# Altium PCB Load_Cell_Amplifier_V2.PcbDoc
Units mil, origin at the board's own origin, x right, y up, seen from the top; angles counter-clockwise.
Board outline 2995 x 1460 mil, 2 copper layers (Top Layer, Bottom Layer); 46 components, 42 nets, 194 pads, 48 vias.
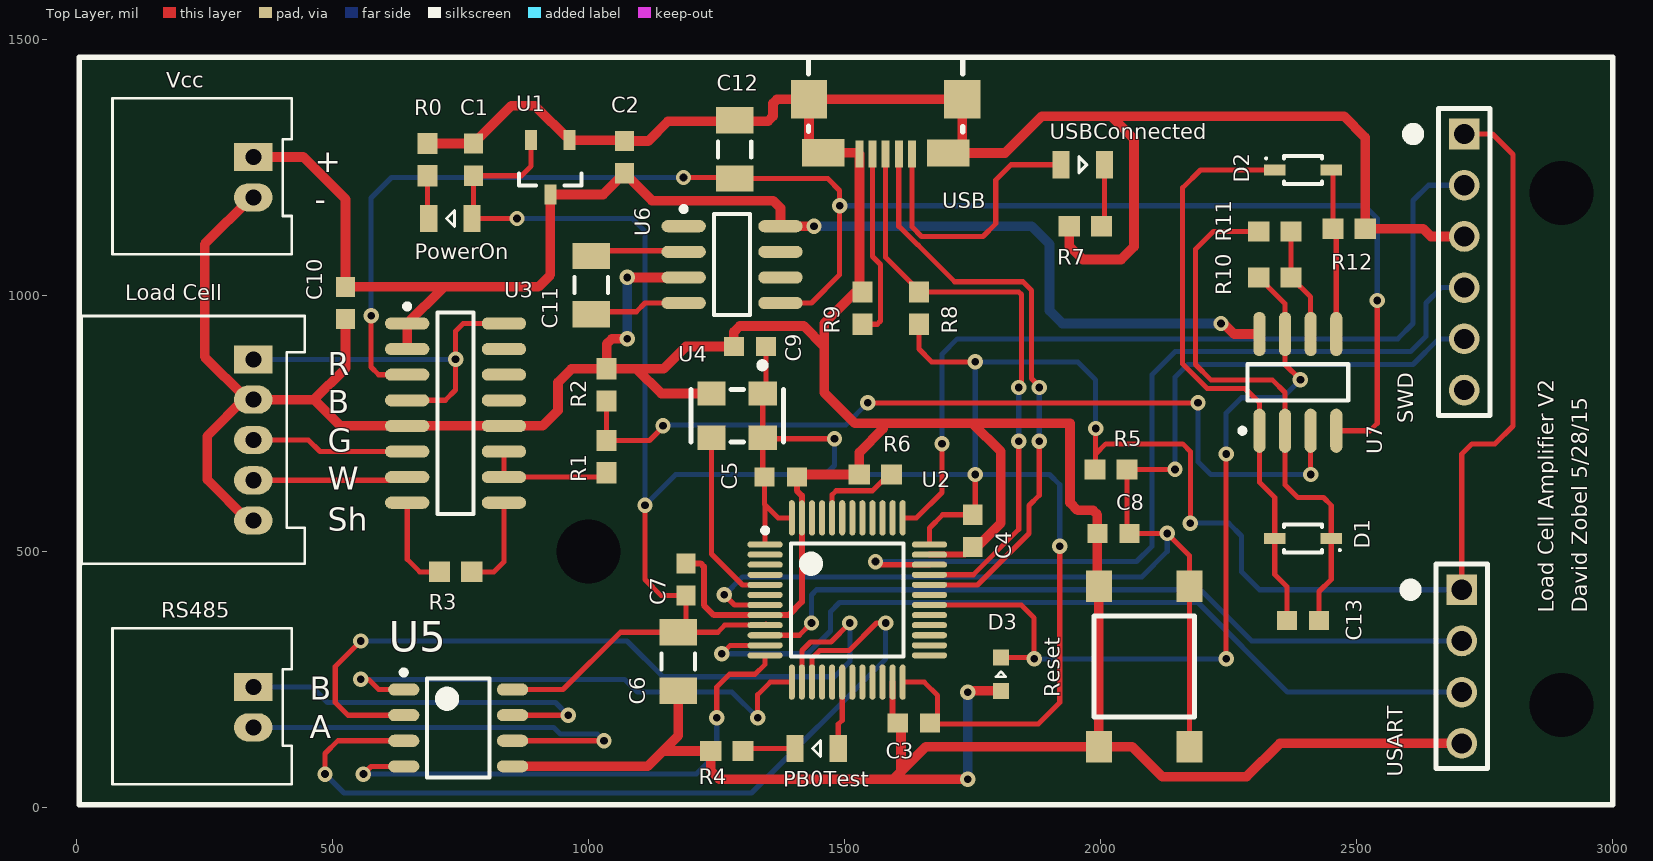
[diagram p0: Top Layer view]
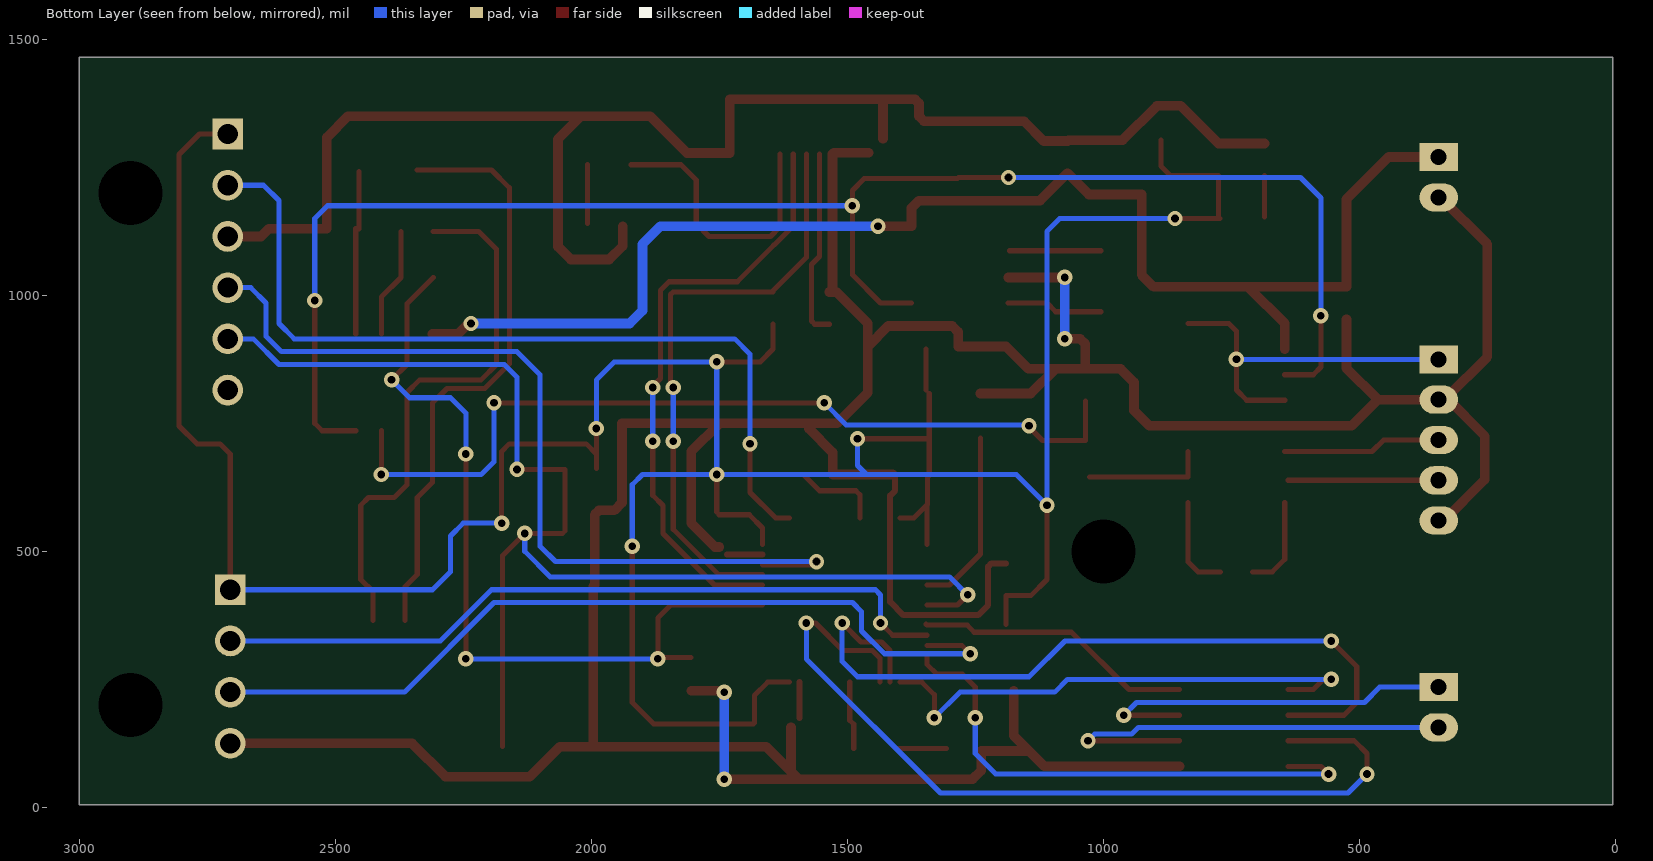
[diagram p1: Bottom Layer view, seen from below]

## Layer stack, top to bottom
Top Layer: signal copper 1.4
Dielectric: dielectric 12.6, FR-4, Dk 4.8
Bottom Layer: signal copper 1.4

## Board outline
5,5 5,1465 3000,1465 3000,5

## Design rules (kind name [scope] priority, off if disabled: settings)
Clearance [All] p1: gap=7
DiffPairsRouting [All] p1: maxlimit=10 minlimit=10 mostfreqgap=10 maxuncoupledlength=500
HoleSize [All] p1: absolutevalues=TRUE maxlimit=150 minlimit=1 maxpercent=80.000 minpercent=20.000
MinimumSolderMaskSliver [All] p1: minsoldermaskwidth=1
PolygonConnect [All] p1: connectstyle=Relief reliefconductorwidth=10 reliefentries=4 polygonreliefangle="90 Angle" airgapwidth=10
RoutingVias [All] p1: holewidth=10 width=20 viastyle="Through Hole" minholewidth=10 minwidth=20 maxholewidth=10 maxwidth=20
SilkToSolderMaskClearance [IsPad] p1: minsilkscreentomaskgap=5 clearancetoexposedcopper=TRUE
SolderMaskExpansion [All] p1: expansion=4
Width [All] p1: maxlimit=20 minlimit=10 preferedwidth=10
24 further rules are at their usual default settings.

## Classes and differential pairs
differential pair USB: +USB_P -USB_N

## Components (designator, comment, footprint, x,y, rotation, side; value= is the part's Value field where it differs from the comment)
C1 "Cap" CAPC0603 775,1265 r90 top
C2 "Cap" CAPC0603 1070,1270 r90 top
C3 "Cap" CAPC0603 1635,165 r180 top
C4 "Cap" CAPC0603 1750,540 r270 top
C5 "Cap" CAPC0603 1375,645 r0 top
C6 "Cap" CAPC1206 1175,285 r90 top
C7 "Cap" CAPC0603 1190,445 r90 top
C8 "Cap" CAPC0603 2025,535 r180 top
C9 "Cap" CAPC0603 1315,900 r180 top
C10 "Cap" CAPC0603 525,985 r90 top
C11 "Cap" CAPC1206 1005,1020 r90 top
C12 "Cap" CAPC1206 1285,1285 r270 top
C13 "Cap" CAPC0603 2395,365 r0 top
D1 "Diode" SOD-323F 2395,525 r180 top
D2 "Diode" SOD-323F 2395,1245 r0 top
D3 "Zener" LED0603 1805,260 r90 top
"Load Cell" "MOLEX-HDR-1x5-SHERLOCK_RA" "MOLEX-HDR-1X5-SHERLOCK- RA" 345,875 r90 top
PB0Test "LED" LED0805 1445,115 r180 top
PowerOn "LED" LED0805 730,1150 r180 top
R0 "Res" RES0603 685,1265 r270 top
R1 "Res" RES0603 1035,685 r90 top
R2 "Res" RES0603 1035,825 r90 top
R3 "Res" RES0603 740,460 r0 top
R4 "Res" RES0603 1270,110 r0 top
R5 "Res" RES0603 2020,660 r0 top
R6 "Res" RES0603 1560,650 r180 top
R7 "Res" RES0603 1970,1135 r0 top
R8 "Res" RES0603 1645,975 r90 top
R9 "Res" RES0603 1535,975 r90 top
R10 "Res" RES0603 2340,1035 r180 top
R11 "Res" RES0603 2340,1125 r0 top
R12 "Res" RES0603 2485,1130 r180 top
Reset "Button" PTS645xxxxSMTR92 2085,275 r90 top
RS485 "2-pin Horz Sherlock" MOLEX-HDR-1X2-SHERLOCK-HORZ 345,235 r90 top
SWD "SWD" SWD_STM32 2710,1315 r0 top
U1 "MCP1703AT" MCP1703AT-xx02EDB 925,1250 r270 top
U2 "STM32F072CB" STM32F072CB 1505,405 r0 top
U3 "INA125" SOIC127P600X175-16N 740,770 r0 top
U4 "636L3C008M" 636L3C 1290,765 r180 top
U5 "SP3485" SP3485 745,155 r0 top
U6 "TC7662B" 8-SOIC 1280,1060 r0 top
U7 "AZ4580MTR-E1" 8-SOIC 2385,830 r90 top
USART "1x4 0.1in Header" "1x4 0.1in Header" 2705,425 r0 top
USB "USB Micro" 10118192-0001LF 1580,1255 r180 top
USBConnected "LED" LED0805 1965,1255 r0 top
Vcc "2-pin Horz Sherlock" MOLEX-HDR-1X2-SHERLOCK-HORZ 345,1270 r90 top

## Footprints (in the part's own frame and the unit in brackets; to place one, negate y for a bottom-side part, rotate by r counter-clockwise, add the part's x,y. Pads: shape width x height; smd on the part's side, far side on the other; paste and mask are expansions set on the pad)
"1x4 0.1in Header" [mil]
  rect 60x60 hole 39.37: 1(0,0)
  round 60 hole 39.37: 2(0,-100) 3(0,-200) 4(0,-300)
  silkscreen extent -110,-349 50,50
8-SOIC [mm] "Used for LMH6612"
  oval 2.2x0.6 smd: 1(-2.4,1.905) 2(-2.4,0.635) 3(-2.4,-0.635) 4(-2.4,-1.905) 5(2.4,-1.905) 6(2.4,-0.635) 7(2.4,0.635) 8(2.4,1.905)
  silkscreen extent -2.52,-2.5 0.9,2.88, body extent -2,-2.5 2,2.5, height 1.75
636L3C [mm]
  rect 1.4x1.2 smd: 1(-1.27,-1.1) 2(1.27,-1.1) 3(1.27,1.1) 4(-1.27,1.1)
  silkscreen extent -2.3,-2.65 2.3,1.3, body extent -2.5,-1.6 2.5,1.6, height 2
10118192-0001LF [mm] "USB Micro-B Recepticle"
  rect 0.4x1.35 smd: 1(-1.3,-0.533) 2(-0.65,-0.533) 3(0,-0.533) 4(0.65,-0.533) 5(1.3,-0.533)
  rect 1.8x1.9 smd: SHD(-3.8,-3.248) SHD(3.8,-3.248)
  rect 2.1x1.35 smd: SHD(-3.1,-0.584) SHD(3.1,-0.598)
  silkscreen extent -3.83,-5.33 3.83,-1.63, body extent -3.96,-5.98 3.96,-0.32, height 3.09
CAPC0603 [mm] "Chip Capacitor, 2-Leads, Body 1.60x0.80mm, IPC Medium Density"
  rect 1x0.95 smd: 1(-0.8,0) 2(0.8,0)
  body extent -0.88,-0.48 0.87,0.48, height 0.8
CAPC1206 [mm] "Chip Capacitor, 2-Leads, Body 3.20x1.60mm, IPC Medium Density"
  rect 1.3x1.85 smd: 1(-1.45,0) 2(1.45,0)
  silkscreen extent -0.4,-0.82 0.4,0.82, body extent -1.7,-0.9 1.7,0.9, height 1.8
LED0603 [mm] "Chip LED, 2-Leads, Body 1.60x0.80mm, IPC Medium Density"
  rect 0.8x0.8 smd: A(-0.825,0) C(0.825,0)
  silkscreen extent -0.13,-0.25 0.12,0.25, body extent -0.88,-0.48 0.87,0.47, height 0.8
LED0805 [mm] "Chip LED, 2-Leads, Body 2.00x1.25mm, IPC Medium Density"
  rect 0.85x1.35 smd: A(-1.075,0) C(1.075,0)
  silkscreen extent -0.2,-0.4 0.2,0.4, body extent -1,-0.63 1,0.63, height 0.75
MCP1703AT-xx02EDB [mm] "SOT23, 3-Leads, Body 2.90x2.55mm, Pitch 0.95mm, IPC Medium Density"
  rect 1x0.6 smd: 1(-1.35,0.95) 2(-1.35,-0.95) 3(1.35,0)
  silkscreen extent 0.3,-1.55 0.9,1.55, body extent -0.9,-1.55 0.9,1.55, height 1.45
MOLEX-HDR-1X2-SHERLOCK-HORZ [mm]
  rect 1.397x1.905 hole 0.8: 1(0,0)
  oval 1.397x1.905 hole 0.8: 2(-2,0)
  silkscreen extent -4.83,-1.91 2.92,6.98, body extent -4.83,-1.91 2.87,8.59, height 5.54
"MOLEX-HDR-1X5-SHERLOCK- RA" [mm]
  rect 1.397x1.905 hole 0.8: 1(0,0)
  oval 1.397x1.905 hole 0.8: 2(-2,0) 3(-4,0) 4(-6,0) 5(-8,0)
  silkscreen extent -10.16,-2.55 2.15,8.51, body extent -10.16,-1.96 2.14,8.54, height 5.54
PTS645xxxxSMTR92 [mm] "PTS645 Series SMT 6 mm Tactile Switch"
  rect 1.555x1.3 smd: A(-3.975,2.25) A(3.975,2.25) B(-3.975,-2.25) B(3.975,-2.25)
  silkscreen extent -2.5,-2.5 2.5,2.5, body extent -3,-3 3,3, height 4.5
RES0603 [mm] "Chip Resistor, 2-Leads, Body 1.60x0.80mm, IPC Medium Density"
  rect 1.05x1 smd: 1(-0.8,0) 2(0.8,0)
  body extent -0.88,-0.48 0.87,0.47, height 0.8
SOD-323F [mm] "Molded Diode, 2-Leads, Body 1.70x1.25mm, IPC Medium Density"
  rect 1.05x0.55 smd: A(-1.4,0) C(1.4,0)
  silkscreen extent -1.88,-0.7 0.95,0.7, body extent -0.9,-0.67 0.9,0.67, height 1
SOIC127P600X175-16N [mm] "SOIC, 16-Leads, Body 9.90x3.90mm, Pitch 1.27mm, IPC Medium Density"
  oval 2.2x0.6 smd: 1(-2.4,4.445) 2(-2.4,3.175) 3(-2.4,1.905) 4(-2.4,0.635) 5(-2.4,-0.635) 6(-2.4,-1.905) 7(-2.4,-3.175) 8(-2.4,-4.445) 9(2.4,-4.445) 10(2.4,-3.175) 11(2.4,-1.905) 12(2.4,-0.635) 13(2.4,0.635) 14(2.4,1.905) 15(2.4,3.175) 16(2.4,4.445)
  silkscreen extent -2.52,-5 0.9,5.42, body extent -2,-5 2,5, height 1.75
SP3485 [mm] "SOIC, 8-Leads, Body 4.90x3.90mm, Pitch 1.27mm, IPC Medium Density"
  oval 1.55x0.6 smd: 1(-2.7,1.905) 2(-2.7,0.635) 3(-2.7,-0.635) 4(-2.7,-1.905) 5(2.7,-1.905) 6(2.7,-0.635) 7(2.7,0.635) 8(2.7,1.905)
  silkscreen extent -2.82,-2.45 1.55,2.88, body extent -1.95,-2.45 1.95,2.45, height 1.75
STM32F072CB [mm] "TSQFP, 48-Leads, Body 7.00x7.00mm, Pitch 0.50mm, IPC Medium Density"
  oval 1.75x0.3 smd: 1(-4.075,2.75) 2(-4.075,2.25) 3(-4.075,1.75) 4(-4.075,1.25) 5(-4.075,0.75) 6(-4.075,0.25) 7(-4.075,-0.25) 8(-4.075,-0.75) 9(-4.075,-1.25) 10(-4.075,-1.75) 11(-4.075,-2.25) 12(-4.075,-2.75) 25(4.075,-2.75) 26(4.075,-2.25) 27(4.075,-1.75) 28(4.075,-1.25) 29(4.075,-0.75) 30(4.075,-0.25) 31(4.075,0.25) 32(4.075,0.75) 33(4.075,1.25) 34(4.075,1.75) 35(4.075,2.25) 36(4.075,2.75)
  oval 0.3x1.75 smd: 13(-2.75,-4.075) 14(-2.25,-4.075) 15(-1.75,-4.075) 16(-1.25,-4.075) 17(-0.75,-4.075) 18(-0.25,-4.075) 19(0.25,-4.075) 20(0.75,-4.075) 21(1.25,-4.075) 22(1.75,-4.075) 23(2.25,-4.075) 24(2.75,-4.075) 37(2.75,4.075) 38(2.25,4.075) 39(1.75,4.075) 40(1.25,4.075) 41(0.75,4.075) 42(0.25,4.075) 43(-0.25,4.075) 44(-0.75,4.075) 45(-1.25,4.075) 46(-1.75,4.075) 47(-2.25,4.075) 48(-2.75,4.075)
  silkscreen extent -4.2,-2.8 2.8,3.57, body extent -3.5,-3.5 3.5,3.5, height 1.6
SWD_STM32 [mil] "SWD connector matching the pinout on STM Discovery Boards"
  rect 60x60 hole 39.37: 1(0,0)
  round 60 hole 39.37: 2(0,-100) 3(0,-200) 4(0,-300) 5(0,-400) 6(0,-500)
  silkscreen extent -110,-550 50,50

## Part data
D1 D2: "Standard Diode Template"
D3: "Zener Diode"
"Load Cell": "Header, Molex, 2mm Pitch Sherlock Header, Single Row, Vertical, 5 Circuits, Length 3.3mm, 0353620550"
Reset: "SPST Button"
RS485 Vcc: library part MOLEX-HDR-1x2-SHERLOCK_RA, "Header, Molex, 2mm Pitch Sherlock Header, Single Row, Horizontal, 2 Circuits, Length 3.3mm,  0353630260"
SWD: library part SWD_STM32, "SWD connector matching the pinout on STM Discovery Boards"
U1: "250 mA, 16V, Low Quiescent Current LDO Regulator"
U2: "MCU 32BIT 128KB FLASH 48LQFP"
U3: "Instrumentation Amplifier"
U4: library part 636L3C, "HCMOS/TTL Clock Oscillator"
U5: "IC TXRX RS485 HALF DUPLEX 8NSOIC"
U6: "Charge Pump DC to DC Voltage Converter"
U7: "IC OPAMP GEN PURP SO-8"
USB: "USB Mini B Metal Shield SMT"

## Free pads (board coordinates)
  round 60 hole 125: 0(1000,500) 0(2900,200) 0(2900,1200)

## Via types
v1: diameter 30, hole 15, Top Layer to Bottom Layer, tented both sides, 48 vias

## Nets (pads, with @x,y where several pads share a name; then routed paths per layer and width w, separated by ;. In a path a pad name is that pad's centre, name@x,y a point inside that pad or via, vN(x,y) a via of type N, cw(c..) or ccw(c..) an arc to the next point about the centre after c; other vN are vias at no path point)
3V3: C1.1 C3.1 C4.1 C5.1 C6.2 C7.1 C9.1 PowerOn.A R5.1 R8.1 SWD.1 U1.2 U2.1 U2.9 U2.24 U2.36 U2.48 U4.1 U4.4 U5.8 USART.1 | length 7294.2
  Top Layer w10: PowerOn.A PowerOn.A@775,1150 ; U5.8 950,230 1062.09,342.09 C6.2 1252.09,342.09 1265.79,355.79 U2.9 U2.9@1346.35,357.57 ; v1(860,1150) PowerOn.A@775,1150 ; U1.2 887.6,1252.6 868.5,1233.5 C1.1 PowerOn.A@775,1150 ; v1(1110,590) 1110,445 1141.5,413.5 C7.1 C6.2@1190,357.09 ; C5.1@1340,648.5 U4.4 U4.1 ; U4.4@1341.69,720 v1(1480,720) ; C5.1 1343.5,591.5 1344.57,590.43 ; U2.1 1344.57,590.43 ; U4.1@1346.5,814.8 C9.1@1346.5,895 ; U2.48 1369.57,565.43 1344.57,590.43 ; U2.24 1655.43,244.57 1681.5,218.5 1681.5,165 1683.5,163 1878,163 1920,205 v1(1920,510) ; R8.1 1645,895 1670,870 v1(1755,870) ; U2.36 1665.43,545.43 1691.5,571.5 C4.1 ; C4.1@1755,576.5 v1(1755,650) ; R5.1@1990,661.5 1990,690 ; v1(1990,740) 1990,690 ; v1(2175,555) 2175,695 2160,710 2010,710 1990,690 ; USART.1 2705,690 2725,710 2770,710 2805,745 2805,1275 2765,1315 SWD.1
  Bottom Layer w10: v1(860,1150) 1085,1150 1110,1125 v1(1110,590) 1170,650 1462.5,650 ; v1(1480,720) 1480,667.5 1462.5,650 ; v1(1920,510) 1920,630 1900,650 v1(1755,650) ; v1(1990,740) 1990,835 1955,870 v1(1755,870) v1(1755,650) ; v1(2175,555) 2250,555 2275,530 2275,460 2310,425 USART.1 ; 1462.5,650 v1(1755,650)
-VCC: C12.2 U3.3 U6.5 U7.4 | length 3195.3
  Top Layer w10: v1(575,960) 575,860 590,845 U3.3 ; v1(1185,1230) C12.2@1282.91,1230 ; C12.2 1467.09,1227.91 1490,1205 v1(1490,1175) 1490,1040 1435,985 U6.5 ; U7.4 2525.51,735.51 2540,750 v1(2540,990)
  Bottom Layer w10: v1(575,960) 575,1190 615,1230 v1(1185,1230) ; v1(1490,1175) 2515,1175 2540,1150 v1(2540,990)
/RE: U2.14 U5.2 | length 1533.8
  Top Layer w10: v1(555,325) 505,275 505,205 530,180 U5.2 ; U2.14 1416.42,306.42 1433,323 1473,323 v1(1510,360)
  Bottom Layer w10: v1(555,325) 1075,325 1145,255 1480,255 1510,285 v1(1510,360)
CLK8MHZ: U2.5 U4.3 | length 356.3
  Top Layer w10: U4.3 1240,495 1300.47,434.53 U2.5
DE: U2.15 U5.3 | length 1711.9
  Top Layer w10: v1(485,65) 485,105 510,130 U5.3 ; U2.15 1436.1,291.1 1451,306 1508.33,306 1562.33,360 v1(1580,360)
  Bottom Layer w10: v1(485,65) 522,28 1318,28 1580,290 v1(1580,360)
DEBUG_RX: U2.11 USART.3 | length 1672.1
  Top Layer w10: v1(1260,300) 1276.42,316.42 U2.11
  Bottom Layer w10: v1(1260,300) 1427.33,300 1472,344.67 1472,382 1490,400 2190,400 2365,225 USART.3
DEBUG_TX: U2.10 USART.2 | length 1470.9
  Top Layer w10: U2.10 1411.1,336.1 v1(1435,360)
  Bottom Layer w10: v1(1435,360) 1435,415 1445,425 2195,425 2295,325 USART.2
GND: "Load Cell.2" "Load Cell.5" C1.2 C2.2 C3.2 C4.2 C5.2 C6.1 C7.2 C8.2 C9.2 C10.1 C12.1 D3.A R0.1 R2.2 R4.1 R6.2 R7.1 R9.2 R12.1 Reset.A SWD.3 U1.1 U2.8 U2.23 U2.35 U2.47 U3.5 U3.12 U4.2 U5.5 U6.3 USART.4 USB.5 USB.SHD Vcc.2 | length 11314.1
  Top Layer w11.9: C7.2 1218.5,476.5 1225,470 1225,395 1244.53,375.47 U2.8 U2.8@1345,375.47 ; U2.8 1390.43,375.52 ; 1390.47,375.47 1416.42,401.42 U2.47 1416.42,608.58 1406.5,618.5 C5.2 ; C3.2@1593.58,174.92 U2.23 ; U2.35 C4.2@1735.08,493.58
  Top Layer w18.9: 355,560.04 334.96,560.04 255,640 255,725 330,800 250,880 250,1100 341.26,1191.26 Vcc.2@360,1191.26 ; 355,796.26 463.74,796.26 ; C10.1 525,857.52 463.74,796.26 ; R0.1 C1.2 848.5,1370 895.55,1370 U1.1 C2.2@1068.35,1303.15 ; U5.5 1115,80 1145,110 ; C2.2 1116.5,1301.5 1155,1340 1350,1340 1360,1350 1360,1375 1367.89,1382.89 USB.SHD@1430.39,1382.89 ; v1(1075,915) 1045,915 1035,905 R2.2 ; v1(1075,1035) U6.3 ; C6.1 1175,140 1145,110 ; U4.2 1141.69,808.31 1093.5,856.5 ; C5.2@1411.5,650 R6.2 1528.5,693.5 1575,740 ; 1430.39,1306.12 USB.SHD@1430.39,1382.89 ; USB.SHD@1457.95,1278.56 USB.5@1526.26,1278.56 ; 1460,900 1420,940 1295,940 1283.5,928.5 C9.2 1190,900 1146.5,856.5 1093.5,856.5 ; USB.5 1528.82,1012.68 R9.2 1521.5,1006.5 1460,945 1460,810 1520,750 1940,750 1940,595 1955,580 1985,580 1993.5,571.5 C8.2 Reset.A@1993.5,434.41 ; 1610,70 C3.2@1610,156.5 ; v1(1740,55) 1595,55 ; v1@1742.52,227.52 D3.A ; C4.2 1758.5,508.5 1805,555 1805,695 1750,750 ; R7.1 1938.5,1096.5 1965,1070 2040,1070 2065,1095 2065,1305 2020,1350 ; Reset.A@1996.42,431.5 Reset.A@1996.42,118.5 ; USART.4 2350,125 2285,60 2120,60 2061.5,118.5 Reset.A@1996.42,118.5 ; SWD.3 2645,1115 2630,1130 R12.1 2516.5,1308.5 2475,1350 2020,1350 ; 463.74,796.26 515,745 U3.5 U3.12 910,745 940,775 940,830 966.5,856.5 R2.2 ; R2.2 1093.5,856.5 ; 1145,110 R4.1 1238.5,71.5 1255,55 1595,55 ; USB.SHD@1430.39,1382.89 1729.61,1382.89 1729.61,1277.89 1812.89,1277.89 1885,1350 2020,1350 ; 1595,55 1658.5,118.5 Reset.A@1996.42,118.5
  Bottom Layer w18.9: v1(1075,915) v1(1075,1035) ; v1(1740,55) v1(1740,225)
JCK/SWCLK: SWD.2 U2.37 | length 1664.5
  Top Layer w10: U2.37 1640.43,565.43 1690,615 v1(1690,710)
  Bottom Layer w10: v1(1690,710) 1690,885 1720,915 2580,915 2610,945 2610,1185 2640,1215 SWD.2
JNTRST: U2.29
JTMS/SWDIO: SWD.4 U2.34 | length 1705.2
  Top Layer w10: v1@1566.1,473.9 U2.34
  Bottom Layer w10: v1(1560,480) 2070,480 2100,510 2100,845 2145,890 2605,890 2635,920 2635,985 2665,1015 SWD.4
NetC11_1: C11.1 U6.4 | length 187.6
  Top Layer w10: C11.1@1005,967.91 1092.91,967.91 1110,985 U6.4
NetC11_2: C11.2 U6.2 | length 177.6
  Top Layer w10: C11.2@1005,1087.09 U6.2@1182.6,1087.09
NetC13_1: C13.1 D1.C D2.A U7.1 | length 1167
  Top Layer w10: D2.A 2195,1245 2160,1210 2160,865.96 2207.96,818 2282,818 2310,790 U7.1 2310,635 2339.88,605.12 D1.C 2339.88,454.88 2363.5,431.26 C13.1
NetPB0Test_A: PB0Test.A U2.18 | length 132.8
  Top Layer w10: PB0Test.A 1487.32,162.32 1495.16,170.16 U2.18
NetPB0Test_C: PB0Test.C R4.2 | length 96.2
  Top Layer w10: R4.2@1306.5,115 PB0Test.C
NetPowerOn_C: PowerOn.C R0.2 | length 80.8
  Top Layer w10: PowerOn.C@685,1152.68 R0.2
NetR1_1: R1.1 U3.10 U3.11 | length 242
  Top Layer w10: U3.11 U3.10 R1.1@1026.5,645
NetR3_1: R3.1 U3.8 | length 183.6
  Top Layer w10: U3.8 645.51,484.49 670,460 R3.1
NetR3_2: R3.2 U3.9 | length 186.6
  Top Layer w10: R3.2 815,460 834.49,479.49 U3.9
NetR6_1: R6.1 U2.44 | length 177.4
  Top Layer w10: U2.44 1475.47,610.47 1483.31,618.31 1554.14,618.31 1585.83,650 R6.1
NetR7_2: R7.2 USBConnected.C | length 114.2
  Top Layer w10: R7.2@2007.32,1140.83 USBConnected.C
NetR9_1: R9.1 USB.4 | length 370.1
  Top Layer w10: R9.1 1563.5,943.5 1570,950 1570,1060 1554.41,1075.59 USB.4
NetR10_1: R10.1 R11.2 U7.6 | length 216.5
  Top Layer w10: R11.2 R10.1 2410,996.5 U7.6
NetRS485_1: RS485.1 U5.7 | length 731.5
  Top Layer w10: U5.7 v1(960,180)
  Bottom Layer w10: RS485.1@360,235 460,235 490,205 935,205 v1(960,180)
NetRS485_2: RS485.2 U5.6 | length 859.6
  Top Layer w10: U5.6 v1(1030,130)
  Bottom Layer w10: RS485.2@360,156.26 931.41,156.26 944.67,143 1017,143 v1(1030,130)
NetUSB_1: USB.1 USBConnected.A | length 549.3
  Top Layer w10: USB.1 1631.18,1133.82 1650,1115 1770,1115 1795,1140 1795,1225 1825,1255 USBConnected.A
NRST: C8.1 R5.2 Reset.B SWD.5 U2.7 | length 2515.6
  Top Layer w10: v1(1265,415) 1284.84,395.16 U2.7 ; C8.1@2051.5,540 R5.2 v1@2140,660 ; C8.1 v1(2130,535) 2173.58,491.42 2173.58,431.5 Reset.B@2173.58,118.5
  Bottom Layer w10: v1(1265,415) 1300,450 2080,450 2130,500 v1(2130,535) ; v1(2145,660) 2145,840 2170,865 2610,865 2660,915 SWD.5
PA6: U2.16
PA7: U2.17
USARTRX: U2.13 U5.1 | length 1020
  Top Layer w10: v1(555,250) 570,250 590,230 U5.1 ; v1(1330,175) 1330,220 1354.57,244.57 U2.13
  Bottom Layer w10: v1(555,250) 1070,250 1095,225 1280,225 v1(1330,175)
USARTTX: U2.12 U5.4 | length 1051.7
  Top Layer w10: v1(560,65) 575,80 U5.4 ; v1(1250,175) 1250,235 1275,260 1325,260 1344.57,279.57 U2.12
  Bottom Layer w10: v1(560,65) 1210,65 1250,105 v1(1250,175)
USB_N: U2.32 USB.2 | length 1175.5
  Top Layer w10: USB.2 1605.59,1135 1605.96,1135 1642.96,1098 1643.5,1098 1715,1026.5 1848.28,1026.5 1865,1009.78 1865,837.43 v1@1880,822.43 ; U2.32@1665.43,434.21 1759.35,434.21 1860,534.86 1860,589.53 1880,609.53 v1(1880,715)
  Bottom Layer w10: v1(1880,715) v1(1880,820)
USB_P: R8.2 U2.33 USB.3 | length 1167.8
  Top Layer w10: USB.3 1580,1074.04 R8.2@1645,1009.04 ; R8.2 1840,1006.5 1845,1001.5 1845,825 v1(1840,820) ; U2.33 1751.06,454.21 1840,543.15 v1(1840,715)
  Bottom Layer w10: v1(1840,715) v1(1840,820)
VCC: C2.1 C10.2 U1.3 U3.1 U3.2 U6.8 U7.8 Vcc.1 | length 2709.4
  Top Layer w18.9: Vcc.1@360,1270 442.68,1270 525,1187.68 C10.2 901.5,1016.5 925,1040 U1.3 1028.35,1196.85 C2.1 1123.5,1185 1360,1185 1374.49,1170.51 U6.8 v1(1440,1135) ; U3.2 U3.1 715,1014.49 ; v1@2240,945 2260.51,924.49 U7.8
  Bottom Layer w18.9: v1(1440,1135) 1865,1135 1900,1100 1900,970 1925,945 v1(2235,945)
VIN+: "Load Cell.3" U3.6 | length 299.8
  Top Layer w10: 355,717.52 452.48,717.52 475,695 U3.6
VIN-: "Load Cell.4" U3.7 | length 284.3
  Top Layer w10: 355,638.78 U3.7@639.29,638.78
VINA-: C13.2 D1.A R11.1 U7.2 | length 1082.2
  Top Layer w10: R11.1 2220,1125 2185,1090 2185,865 2215,835 2335,835 2360,810 U7.2 2360,630 2385,605 2435,605 2450.12,589.88 D1.A 2450.12,445.12 2426.5,421.5 C13.2
VINB+: D2.C R12.2 U7.5 | length 317.1
  Top Layer w10: R12.2 D2.C@2453.5,1241.61 ; U7.5 R12.2@2460,1130
VOUT: D3.C R10.2 U2.30 U7.7 | length 1615.7
  Top Layer w10: U2.30 1844.84,395.16 1870,370 v1@1870,292.48 ; D3.C v1@1867.52,292.48 ; v1(2245,290) v1(2245,690) ; R10.2 2360,983.5 U7.7 2360,865 v1(2390,835)
  Bottom Layer w10: v1(1870,290) v1(2245,290) ; v1(2245,690) 2245,770 2275,800 2355,800 v1(2390,835)
VOUT+/-: R1.2 R2.1 U7.3 | length 1706.6
  Top Layer w10: R2.1 R1.2 1118.5,716.5 v1@1145,742.99 ; v1(1545,790) 2180,790 2190,780 v1(2190,790) ; v1(2410,650) U7.3
  Bottom Layer w10: v1(1145,745) 1147,747 1502,747 v1(1545,790) ; v1(2190,790) 2190,675 2215,650 v1(2410,650)
VREF10: "Load Cell.1" U3.4 U3.16 | length 703.5
  Top Layer w10: U3.4 720,795 740,815 v1(740,875) 740,930 755,945 U3.16
  Bottom Layer w10: 355,875 v1(740,875)
pads on no net: SWD.6 U2.2 U2.3 U2.4 U2.6 U2.19 U2.20 U2.21 U2.22 U2.25 U2.26 U2.27 U2.28 U2.31 U2.38 U2.39 U2.40 U2.41 U2.42 U2.43 U2.45 U2.46 U3.13 U3.14 U3.15 U6.1 U6.6 U6.7

## Silkscreen, mask and mechanical layers (free items; w line width, h text height)
Top Overlay:
  the board outline again, w10
  text "+" at 465,1240 h45
  text "-" at 465,1165 h45
  text "R" at 490,843.5 h45
  text "B" at 490,770 h45
  text "G" at 490,695 h45
  text "W" at 490,620 h45
  text "Sh" at 490,540 h45
  text "Load Cell Amplifier V2" at 2885,380 h30 r90
  text "David Zobel 5/28/15" at 2950,380 h30 r90
  text "B" at 455,210 h45
  text "A" at 455,135 h45